# Altium PCB Face.PcbDoc
Units mil, origin at the board's own origin, x right, y up, seen from the top; angles counter-clockwise.
Board outline 4307 x 4307 mil, 2 copper layers (Top Layer, Bottom Layer); 3 components, 2 nets, 6 pads, 0 vias.
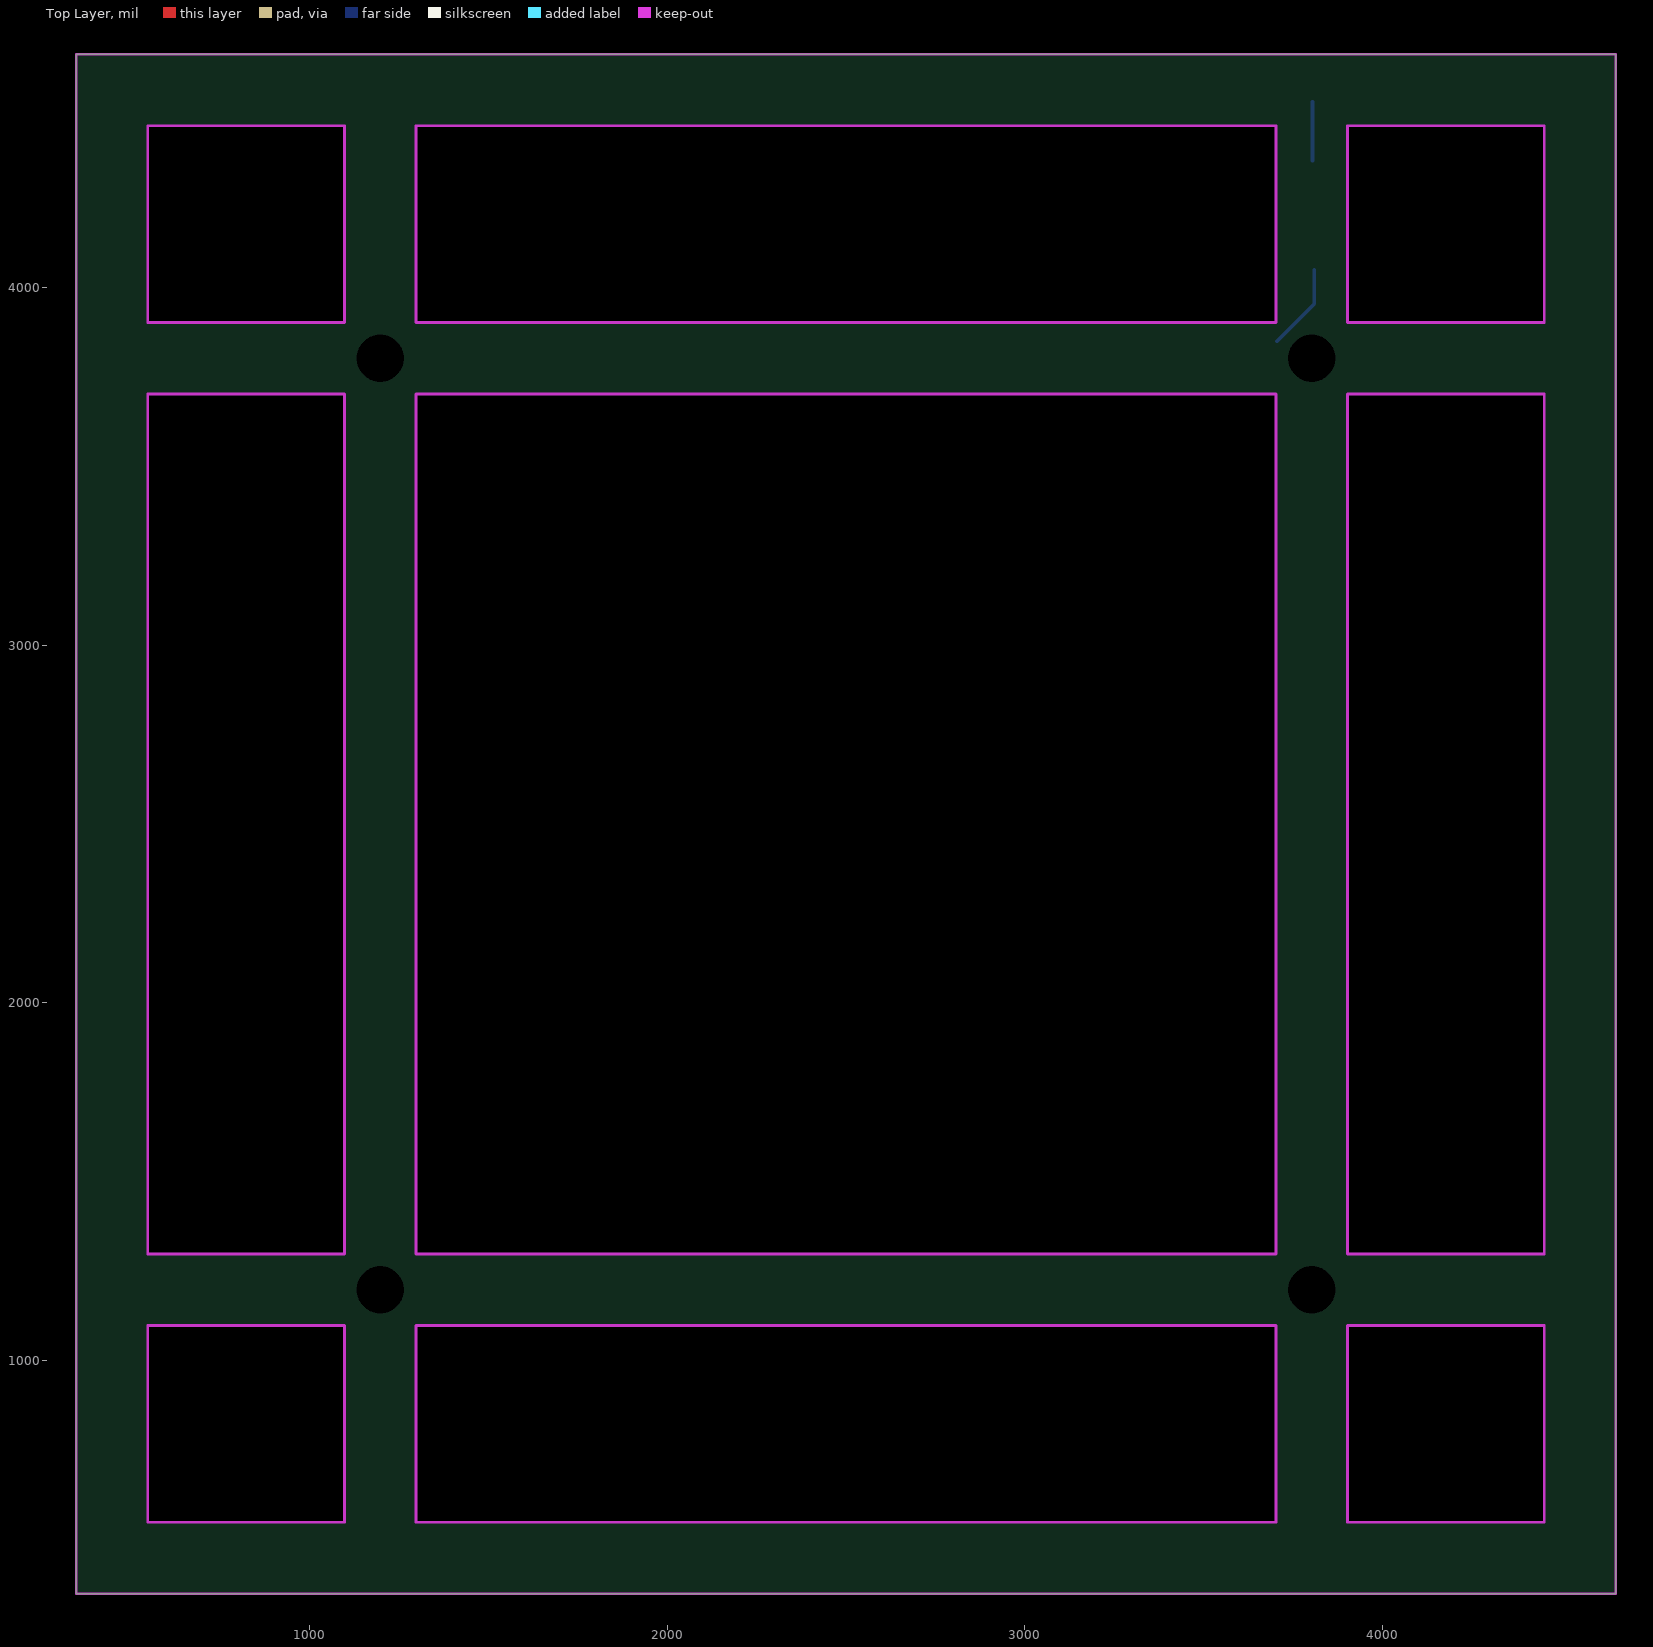
[diagram p0: Top Layer view]
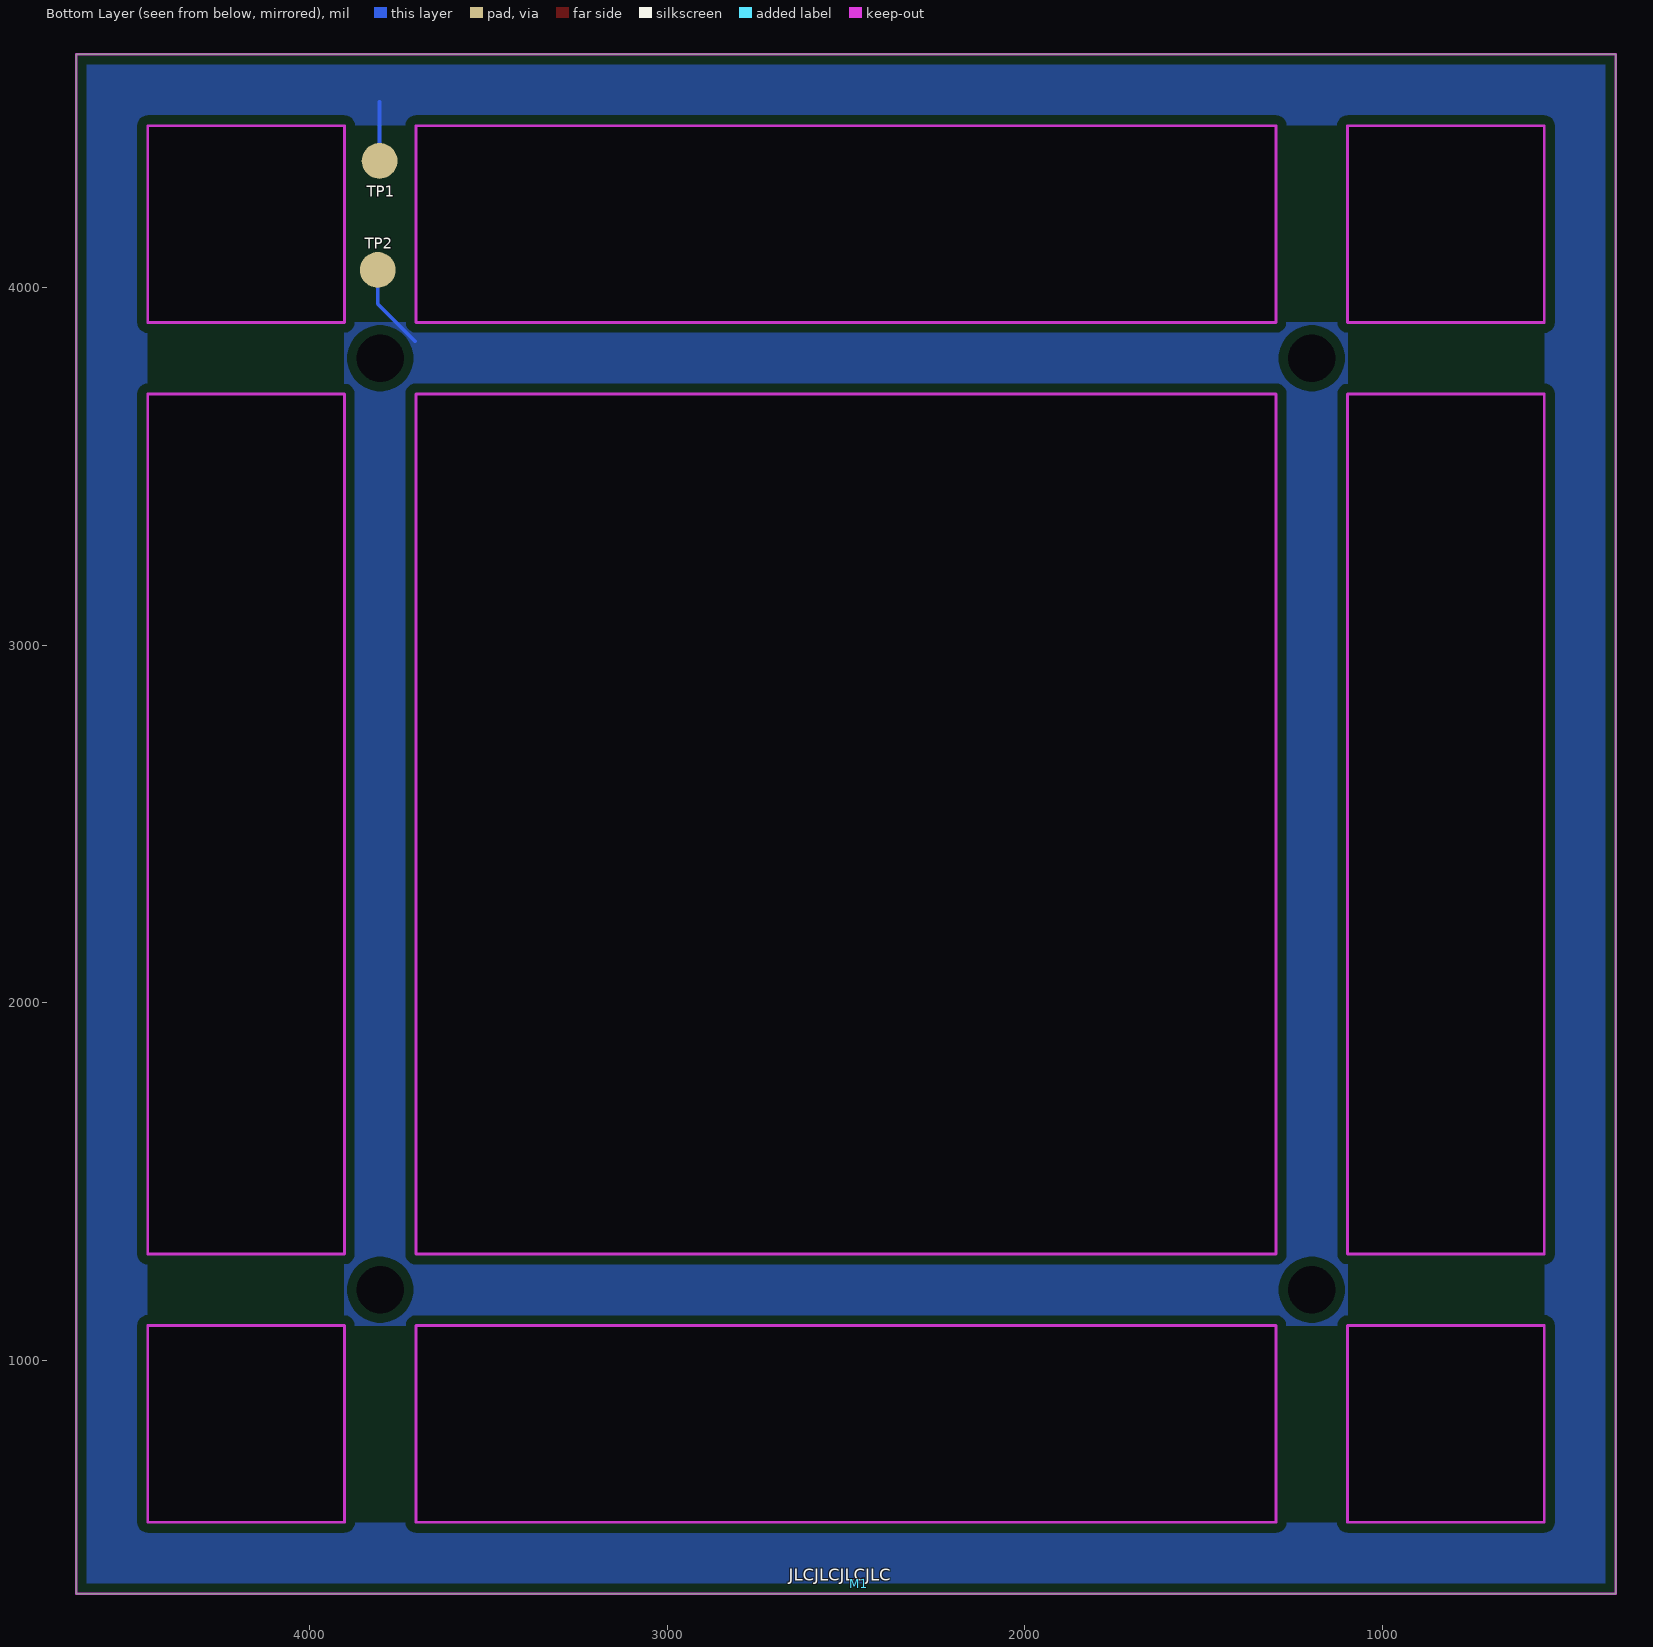
[diagram p1: Bottom Layer view, seen from below]

## Layer stack, top to bottom
Top Solder: solder mask 0.4, Solder Resist, Dk 3.5
Top Layer: signal copper 1.4
Dielectric 1: dielectric 12.6, FR-4, Dk 4.8
Bottom Layer: signal copper 1.4
Bottom Solder: solder mask 0.4, Solder Resist, Dk 3.5

## Board outline
346.5,346.5 4653.5,346.5 4653.5,4653.5 346.5,4653.5
cut-out: 3903.15,1096.85 4453.5,1096.85 4453.5,546.5 3903.15,546.5
cut-out: 1296.85,1096.85 1296.85,546.5 3703.15,546.5 3703.15,1096.85
cut-out: 546.5,1096.85 1096.85,1096.85 1096.85,546.5 546.5,546.5
cut-out: 546.5,3703.15 1096.85,3703.15 1096.85,1296.85 546.5,1296.85
cut-out: 1296.85,3703.15 3703.15,3703.15 3703.15,1296.85 1296.85,1296.85
cut-out: 3903.15,3703.15 4453.5,3703.15 4453.5,1296.85 3903.15,1296.85
cut-out: 3903.15,4453.5 4453.5,4453.5 4453.5,3903.15 3903.15,3903.15
cut-out: 1296.85,4453.5 1296.85,3903.15 3703.15,3903.15 3703.15,4453.5
cut-out: 546.5,4453.5 1096.85,4453.5 1096.85,3903.15 546.5,3903.15

## Design rules (kind name [scope] priority, off if disabled: settings)
Clearance Clearance_Poly [All vs InPoly] p1: gap=25 ignorepadtopadclearanceinfootprint=FALSE
Clearance [All] p2: gap=6.4 ignorepadtopadclearanceinfootprint=FALSE except(0: Arc-Hole Track-Hole SMDPad-Hole THPad-Hole Via-Hole Fill-Hole Poly-Hole Region-Hole Text-Hole)
HoleSize [All] p1: absolutevalues=TRUE maxlimit=99999 minlimit=1 maxpercent=80.000 minpercent=20.000
MinimumSolderMaskSliver [All] p1: minsoldermaskwidth=6
PolygonConnect [All] p1: connectstyle=Relief reliefconductorwidth=10 reliefentries=4 polygonreliefangle="90 Angle" airgapwidth=10
RoutingVias [All] p1: holewidth=28 width=50 viastyle="Through Hole" minholewidth=28 minwidth=50 maxholewidth=28 maxwidth=50
SilkToSolderMaskClearance [IsPad] p1: minsilkscreentomaskgap=0 clearancetoexposedcopper=TRUE
SolderMaskExpansion [All] p1: expansion=4 istentingtop=FALSE
Width [All] p1: maxlimit=10000 minlimit=6 preferedwidth=10
27 further rules are at their usual default settings.

## Components (designator, comment, footprint, x,y, rotation, side; value= is the part's Value field where it differs from the comment)
M1 "JLC_NUMBER" JLC_NUMBER 2465,375 r180 bottom
TP1 "TESTPOINT_100mil" TESTPOINT_100mil 3805,4355 r180 bottom
TP2 "TESTPOINT_100mil" TESTPOINT_100mil 3810,4050 r180 bottom

## Footprints (in the part's own frame and the unit in brackets; to place one, negate y for a bottom-side part, rotate by r counter-clockwise, add the part's x,y. Pads: shape width x height; smd on the part's side, far side on the other; paste and mask are expansions set on the pad)
JLC_NUMBER [mil]
TESTPOINT_100mil [mil]
  round 100 smd: 1(0,0)

## Part data
M1: "JLC Order Number Location", Manufacturer Part Number=JLC_NUMBER, PartNumber=JLC_NUMBER
TP1 TP2: Manufacturer Part Number=TESTPOINT_100mil, PartNumber=TESTPOINT_100mil

## Free pads (board coordinates)
  round 10 hole 133.86 unplated: 0(1196.85,1196.85) 0(1196.85,3803.15) 0(3803.15,1196.85) 0(3803.15,3803.15)

## Nets (pads, with @x,y where several pads share a name; then routed paths per layer and width w, separated by ;. In a path a pad name is that pad's centre, name@x,y a point inside that pad or via, vN(x,y) a via of type N, cw(c..) or ccw(c..) an arc to the next point about the centre after c; other vN are vias at no path point)
TP1: TP1.1 | length 165
  Bottom Layer w10: TP1.1 3805,4520
TP2: TP2.1 | length 243.5
  Bottom Layer w10: 3705,3850 3810,3955 TP2.1

## Polygon pours and split planes (outlines as drawn)
TP1 on Bottom Layer "TP1_L02_P003" (solid, pour order 3): 347.12,4653.28 4653.28,4653.28 4653.5,4653.5 4653.5,346.5 346.5,346.5
TP2 on Bottom Layer "TP2_L02_P002" (solid, pour order 2): 1096.85,3903.15 3903.15,3903.15 3903.15,1096.85 1096.85,1096.85

## Keep-outs
Keep-Out Layer:
  lines w7.87: 346.5,346.5 346.5,4653.5 4653.5,4653.5 4653.5,346.5 346.5,346.5 ; 546.5,546.5 1096.85,546.5 1096.85,1096.85 546.5,1096.85 546.5,546.5 ; 546.5,1296.85 546.5,3703.15 1096.85,3703.15 1096.85,1296.85 546.5,1296.85 ; 546.5,3903.15 546.5,4453.5 1096.85,4453.5 1096.85,3903.15 546.5,3903.15 ; 1296.85,546.5 1296.85,1096.85 3703.15,1096.85 3703.15,546.5 1296.85,546.5 ; 1296.85,1296.85 1296.85,3703.15 3703.15,3703.15 3703.15,1296.85 1296.85,1296.85 ; 1296.85,3903.15 1296.85,4453.5 3703.15,4453.5 3703.15,3903.15 1296.85,3903.15 ; 3903.15,546.5 4453.5,546.5 4453.5,1096.85 3903.15,1096.85 3903.15,546.5 ; 3903.15,1296.85 4453.5,1296.85 4453.5,3703.15 3903.15,3703.15 3903.15,1296.85 ; 3903.15,3903.15 3903.15,4453.5 4453.5,4453.5 4453.5,3903.15 3903.15,3903.15

## Other copper
Multi-Layer:
  pour cut-out: 546.5,3903.15 1096.85,3903.15 1096.85,1096.85 3903.15,1096.85 3903.15,3903.15 1096.85,3903.15 1096.85,4453.5 4453.5,4453.5 4453.5,546.5 546.5,546.5

## Silkscreen, mask and mechanical layers (free items; w line width, h text height)
Mechanical 1:
  lines w7.87: 346.5,346.5 4653.5,346.5 4653.5,4653.5 346.5,4653.5 346.5,346.5 ; 546.5,546.5 546.5,1096.85 1096.85,1096.85 1096.85,546.5 546.5,546.5 ; 546.5,1296.85 1096.85,1296.85 1096.85,3703.15 546.5,3703.15 546.5,1296.85 ; 546.5,3903.15 1096.85,3903.15 1096.85,4453.5 546.5,4453.5 546.5,3903.15 ; 1296.85,546.5 3703.15,546.5 3703.15,1096.85 1296.85,1096.85 1296.85,546.5 ; 1296.85,1296.85 3703.15,1296.85 3703.15,3703.15 1296.85,3703.15 1296.85,1296.85 ; 1296.85,3903.15 3703.15,3903.15 3703.15,4453.5 1296.85,4453.5 1296.85,3903.15 ; 3903.15,546.5 3903.15,1096.85 4453.5,1096.85 4453.5,546.5 3903.15,546.5 ; 3903.15,1296.85 3903.15,3703.15 4453.5,3703.15 4453.5,1296.85 3903.15,1296.85 ; 3903.15,3903.15 4453.5,3903.15 4453.5,4453.5 3903.15,4453.5 3903.15,3903.15
  text "CUTOUT" at 645,4175 h60
  text "CUTOUT" at 2270,4175 h60
  text "CUTOUT" at 4000,4165 h60
  text "CUTOUT" at 4040,2550 h60
  text "CUTOUT" at 670,2540 h60
  text "CUTOUT" at 2270,2515 h60
  text "CUTOUT" at 2320,815 h60
  text "CUTOUT" at 4010,805 h60
  text "CUTOUT" at 665,790 h60

## Text inside footprints (layer, text, board x,y; h text height)
M1: Bottom Overlay "JLCJLCJLCJLC" at 2660.15,382.87 h33.46